# Altium PCB Muladhara_Circuit.PcbDoc
Units mm, origin at the board's own origin, x right, y up, seen from the top; angles counter-clockwise.
Board outline 20.59 x 33.58 mm, 4 copper layers (Top Layer, Layer 1, Layer 2, Bottom Layer), stack 0.603 mm thick; 35 components, 46 nets, 139 pads, 12 vias.
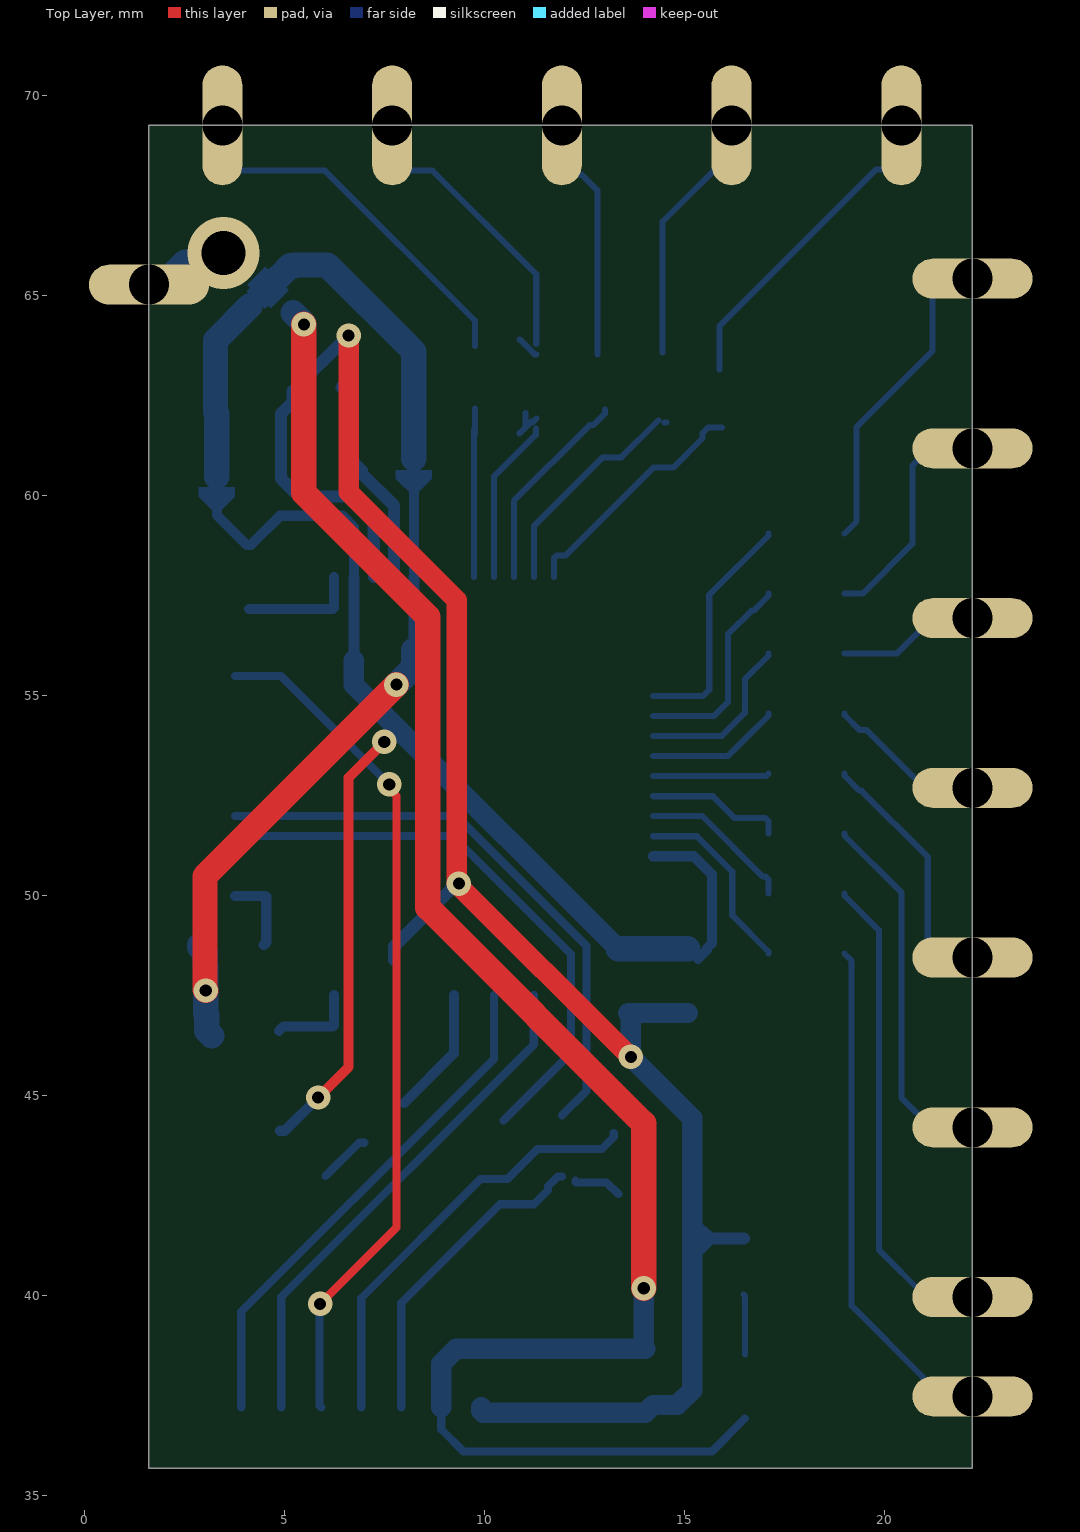
[diagram p0: Top Layer view]
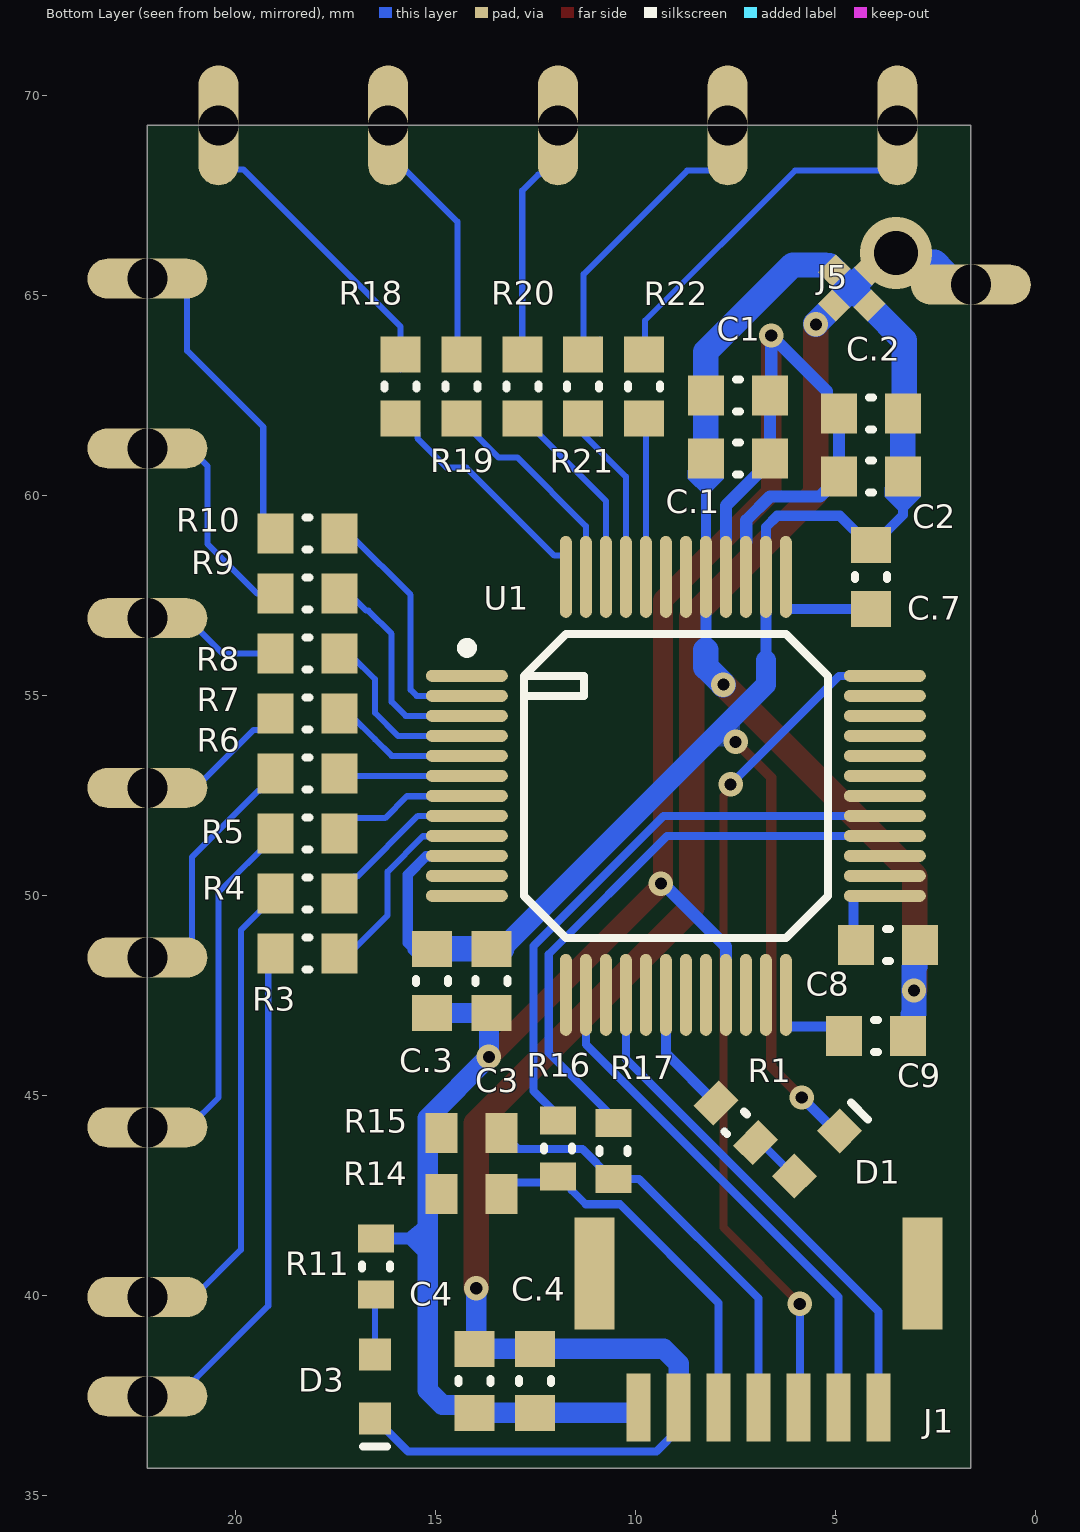
[diagram p1: Bottom Layer view, seen from below]
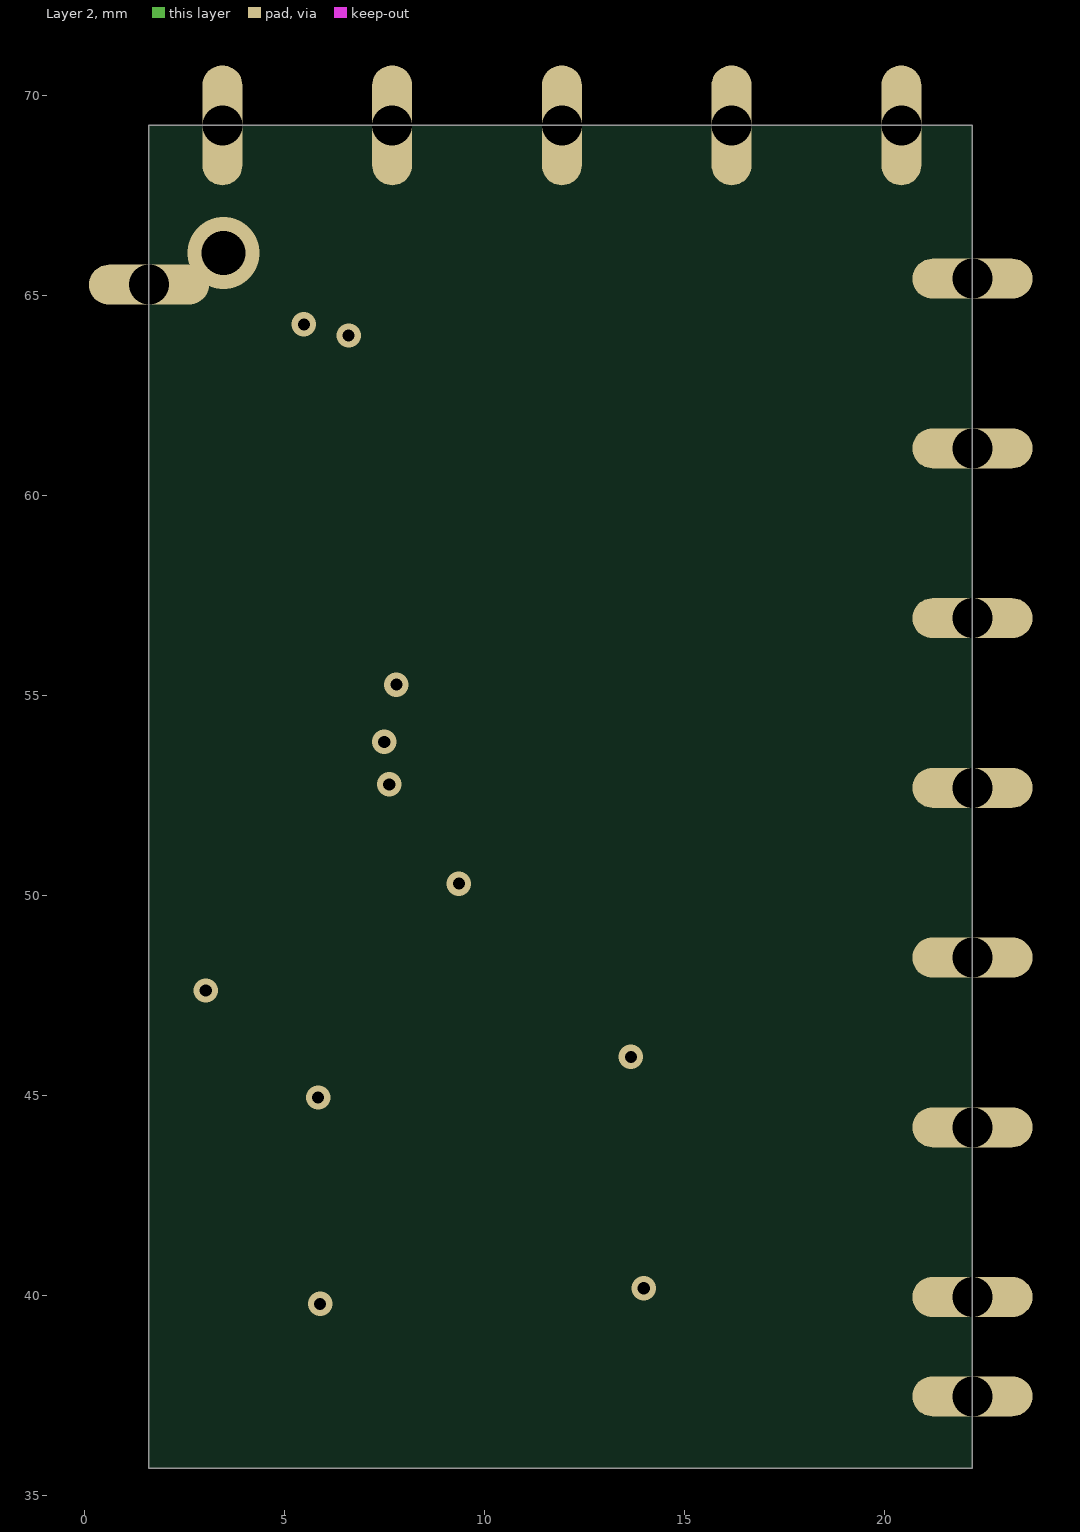
[diagram p2: Layer 2]

## Layer stack, top to bottom
Top Solder: solder mask 0.0102, Solder Resist, Dk 3.5
Top Layer: signal copper 0.0356
Dielectric 2: prepreg 0.0711, PP-006, Dk 4.1
Layer 1: signal copper 0.035
Dielectric 1: dielectric 0.32, FR-4, Dk 4.8
Layer 2: signal copper 0.035
Dielectric 3: prepreg 0.0711, PP-006, Dk 4.1
Bottom Layer: signal copper 0.0356
Bottom Solder: solder mask 0.0102, Solder Resist, Dk 3.5

## Board outline
1.612,35.687 1.612,69.262 22.2,69.262 22.2,35.687

## Design rules (kind name [scope] priority, off if disabled: settings)
BoardOutlineClearance [All] p1: gap=0.254 ignorepadtopadclearanceinfootprint=FALSE except(0: Arc-SplitContinuation Track-SplitContinuation SMDPad-SplitContinuation THPad-SplitContinuation Via-SplitContinuation Fill-SplitContinuation Poly-SplitContinuation Region-SplitContinuation Text-SplitContinuation; 0.508: Poly-OutlineEdge Poly-CavityEdge Poly-CutoutEdge Poly-SplitBarrior)
Clearance [All] p1: gap=0.152 ignorepadtopadclearanceinfootprint=FALSE except(0.305: Arc-Hole Track-Hole SMDPad-Hole THPad-Hole Via-Hole Fill-Hole Poly-Hole Region-Hole)
HoleSize [All] p1: absolutevalues=TRUE maxlimit=6.3 minlimit=0.3 maxpercent=80.000 minpercent=20.000
MinimumAnnularRing [All] p1: minimumring=0.152
MinimumSolderMaskSliver [All] p1: minsoldermaskwidth=0.178
PolygonConnect PolygonConnect_1 [All] p1: thpad.connectstyle=Relief thpad.reliefconductorwidth=0.254 thpad.reliefentries=4 thpad.polygonreliefangle="90 Angle" thpad.airgapwidth=0.254 smdpad.connectstyle=Direct smdpad.reliefconductorwidth=0.254 smdpad.reliefentries=4 smdpad.polygonreliefangle="90 Angle" smdpad.airgapwidth=0.254 via.connectstyle=Direct via.reliefconductorwidth=0.254 via.reliefentries=4 via.polygonreliefangle="90 Angle" via.airgapwidth=0.254
PolygonConnect gnd_stitch_via [InNet('GND') vs InNet('GND')] p2: thpad.connectstyle=Relief thpad.reliefconductorwidth=0.254 thpad.reliefentries=4 thpad.polygonreliefangle="90 Angle" thpad.airgapwidth=0.254 smdpad.connectstyle=Relief smdpad.reliefconductorwidth=0.254 smdpad.reliefentries=4 smdpad.polygonreliefangle="90 Angle" smdpad.airgapwidth=0.254 via.connectstyle=Direct via.reliefconductorwidth=0.254 via.reliefentries=4 via.polygonreliefangle="90 Angle" via.airgapwidth=0.254
PolygonConnect gnd_ties [InComponentClass('net_ties')] p3: connectstyle=Direct reliefconductorwidth=0.254 reliefentries=4 polygonreliefangle="90 Angle" airgapwidth=0.254
RoomDefinition Power [InComponentClass('Power')] p1: confinementstyle=ConfineOut formatcopy=TRUE lockcomponents=FALSE outline 47.346,-89.306 98.146,-89.306 98.146,-63.906 47.346,-63.906
RoomDefinition CY8C4125AZI-S433 [InComponentClass('CY8C4125AZI-S433')] p2: confinementstyle=ConfineOut formatcopy=TRUE lockcomponents=FALSE outline -10.363,-89.306 40.437,-89.306 40.437,-63.906 -10.363,-63.906
RoomDefinition CSX_Capsense [InComponentClass('CSX_Capsense')] p3: confinementstyle=ConfineOut formatcopy=TRUE lockcomponents=FALSE outline 57.455,-42.062 65.964,-42.062 65.964,-37.49 57.455,-37.49
RoomDefinition Comm [InComponentClass('Comm')] p4: confinementstyle=ConfineOut formatcopy=TRUE lockcomponents=FALSE outline 60.96,-47.244 64.77,-47.244 64.77,-42.672 60.96,-42.672
RoutingVias [All] p1: holewidth=0.711 width=1.27 viastyle="Through Hole" minholewidth=0.305 minwidth=0.61 maxholewidth=1.27 maxwidth=2.54
SilkToSilkClearance [All] p1: silktosilkclearance=0.102
SilkToSolderMaskClearance [IsPad] p1: minsilkscreentomaskgap=0.178 clearancetoexposedcopper=TRUE
SolderMaskExpansion [All] p1: expansion=0.102 istentingtop=FALSE
Width [All] p1: maxlimit=3.556 minlimit=0.152 preferedwidth=0.254 toplayer_maxwidth=2.54 midlayer1_maxwidth=2.54 midlayer2_maxwidth=2.54 minimp=50.000000 maximp=50.000000 favimp=50.000000
26 further rules are at their usual default settings.

## Classes and differential pairs
component class Power: D3 J5 R11
component class CY8C4125AZI-S433: C1 C2 C3 C.1 C.2 C.3 C.7 R14 R15 R16 R17 U1
component class CSX_Capsense: C8 C9 R3 R4 R5 R6 R7 R8 R9 R10 R18 R19 R20 R21 R22
component class Comm: C4 C.4 D1 J1 R1

## Components (designator, comment, footprint, x,y, rotation, side; value= is the part's Value field where it differs from the comment)
C1 "1uF" CAPC0603(1608)100_N 7.436,62.503 r180 bottom
C2 "1uF" CAPC0603(1608)100_N 4.111,60.482 r180 bottom
C3 "1uF" CAPC0603(1608)100_N 13.594,47.873 r90 bottom
C4 "1uF" CAPC0603(1608)100_N 14.021,37.877 r90 bottom
C8 "470pF" CAPC0603(1608)100_N 3.683,48.768 r180 bottom
C9 "470pF" CAPC0603(1608)100_N 3.986,46.497 r180 bottom
C.1 "0.1uF" CAPC0603(1608)100_N 7.436,60.932 r180 bottom value=1uF
C.2 "0.1uF" CAPC0603(1608)100_N 4.111,62.053 r180 bottom value=1uF
C.3 "0.1uF" CAPC0603(1608)100_N 15.086,47.873 r90 bottom value=1uF
C.4 "0.1uF" CAPC0603(1608)100_N 12.512,37.877 r90 bottom value=1uF
C.7 "0.1uF" CAPC0603(1608)100_N 4.111,57.973 r90 bottom value=1uF
D1 "150060BS75000" 0603_A 5.461,43.561 r315 bottom
D3 "150060BS75000" 0603_A 16.509,37.731 r90 bottom
J1 "BM07B-NSHSS-TBT (LF)(SN)" "BM07B-NSHSS-TBT (LF)(SN)" 16.919,45.214 r0 bottom
J5 "Star_tie" Star_tie -464.314,-427.229 r225 bottom net-tie
R1 "330" RESC0603(1608)_L 7.493,44.323 r225 bottom value="330.00 Ohm"
R3 "2K" RESC0603(1608)_N 18.201,48.556 r0 bottom value="2000.00 Ohm"
R4 "2K" RESC0603(1608)_N 18.201,50.056 r0 bottom value="2000.00 Ohm"
R5 "2K" RESC0603(1608)_N 18.201,51.556 r0 bottom value="2000.00 Ohm"
R6 "2K" RESC0603(1608)_N 18.201,53.056 r0 bottom value="2000.00 Ohm"
R7 "2K" RESC0603(1608)_N 18.201,54.556 r0 bottom value="2000.00 Ohm"
R8 "2K" RESC0603(1608)_N 18.201,56.056 r0 bottom value="2000.00 Ohm"
R9 "2K" RESC0603(1608)_N 18.201,57.556 r0 bottom value="2000.00 Ohm"
R10 "2K" RESC0603(1608)_N 18.201,59.056 r0 bottom value="2000.00 Ohm"
R11 "330" RESC0603(1608)_L 16.485,40.732 r270 bottom value="330.00 Ohm"
R14 "4.7K" RESC1608X55X25ML10T15 14.097,42.545 r0 bottom
R15 "4.7K" RESC1608X55X25ML10T15 14.097,44.069 r0 bottom
R16 "330" RESC0603(1608)_L 11.938,43.688 r270 bottom value="330.00 Ohm"
R17 "330" RESC0603(1608)_L 10.541,43.623 r270 bottom value="330.00 Ohm"
R18 "2K" RESC0603(1608)_N 15.875,62.738 r90 bottom value="2000.00 Ohm"
R19 "2K" RESC0603(1608)_N 14.351,62.738 r90 bottom value="2000.00 Ohm"
R20 "2K" RESC0603(1608)_N 12.827,62.738 r90 bottom value="2000.00 Ohm"
R21 "2K" RESC0603(1608)_N 11.303,62.738 r90 bottom value="2000.00 Ohm"
R22 "2K" RESC0603(1608)_N 9.779,62.738 r90 bottom value="2000.00 Ohm"
U1 "CY8C4125AZI-S433" CY8C4125AZI-S433 8.986,52.748 r180 bottom locked

## Footprints (in the part's own frame and the unit in brackets; to place one, negate y for a bottom-side part, rotate by r counter-clockwise, add the part's x,y. Pads: shape width x height; smd on the part's side, far side on the other; paste and mask are expansions set on the pad)
0603_A [mm] "Chip LED, 2-Leads, Body 1.6x0.8mm, IPC Medium Density"
  rect 0.8x0.8 smd: 1(-0.8,0) 2(0.8,0)
  silkscreen extent -1.5,-0.3 -1.5,0.3, body extent -0.8,-0.4 0.8,0.4, height 0.7
"BM07B-NSHSS-TBT (LF)(SN)" [mm]
  rect 1x2.8 smd paste-2.54 mask+0.1: 0(-14.1,4.65) 0(-5.9,4.65)
  rect 0.6x1.7 smd paste-2.54 mask+0.1: 1(-13,8) 2(-12,8) 3(-11,8) 4(-10,8) 5(-9,8) 6(-8,8) 7(-7,8)
CAPC0603(1608)100_N [mm] "Chip Capacitor, Body 1.6x0.8mm, Height 1.0mm, IPC Medium Density"
  rect 0.9x1 smd: 1(-0.8,0) 2(0.8,0)
  silkscreen extent -0.05,-0.4 0.05,0.4, body extent -0.87,-0.48 0.88,0.47, height 1
CY8C4125AZI-S433 [mm] "CQFP, 48-Leads, Body 11.70x11.70mm, Pitch 0.50mm, IPC Medium Density"
  oval 2.05x0.3 smd: 1(-5.225,2.75) 2(-5.225,2.25) 3(-5.225,1.75) 4(-5.225,1.25) 5(-5.225,0.75) 6(-5.225,0.25) 7(-5.225,-0.25) 8(-5.225,-0.75) 9(-5.225,-1.25) 10(-5.225,-1.75) 11(-5.225,-2.25) 12(-5.225,-2.75) 25(5.225,-2.75) 26(5.225,-2.25) 27(5.225,-1.75) 28(5.225,-1.25) 29(5.225,-0.75) 30(5.225,-0.25) 31(5.225,0.25) 32(5.225,0.75) 33(5.225,1.25) 34(5.225,1.75) 35(5.225,2.25) 36(5.225,2.75)
  oval 0.3x2.05 smd: 13(-2.75,-5.225) 14(-2.25,-5.225) 15(-1.75,-5.225) 16(-1.25,-5.225) 17(-0.75,-5.225) 18(-0.25,-5.225) 19(0.25,-5.225) 20(0.75,-5.225) 21(1.25,-5.225) 22(1.75,-5.225) 23(2.25,-5.225) 24(2.75,-5.225) 37(2.75,5.225) 38(2.25,5.225) 39(1.75,5.225) 40(1.25,5.225) 41(0.75,5.225) 42(0.25,5.225) 43(-0.25,5.225) 44(-0.75,5.225) 45(-1.25,5.225) 46(-1.75,5.225) 47(-2.25,5.225) 48(-2.75,5.225)
  silkscreen extent -5.35,-3.8 3.8,3.8, body extent -3.5,-3.5 3.5,3.5, height 1.4
RESC0603(1608)_L [mm] "Chip Resistor, Body 1.6x0.8mm, IPC High Density"
  rect 0.7x0.9 smd: 1(-0.7,0) 2(0.7,0)
  silkscreen extent -0.05,-0.35 0.05,0.35, body extent -0.85,-0.47 0.85,0.47, height 0.6
RESC0603(1608)_N [mm] "Chip Resistor, Body 1.6x0.8mm, IPC Medium Density"
  rect 0.9x1 smd: 1(-0.8,0) 2(0.8,0)
  silkscreen extent -0.05,-0.4 0.05,0.4, body extent -0.85,-0.47 0.85,0.47, height 0.6
RESC1608X55X25ML10T15 [mm] "Chip Resistor, 2-Leads, Body 1.60x0.80mm, IPC Low Density"
  rect 0.8x1 smd: 1(-0.75,0) 2(0.75,0)
  body extent -0.85,-0.45 0.85,0.45, height 0.55
Star_tie [mil]
  rect 25x20 smd paste-100 mask-100: 1(-26762.49,680.64) 3(-26762.49,630.26)
  rect 20x25 smd paste-100 mask-100: 2(-26737.66,654.99) 4(-26786.7,654.78)
  Top Layer region: -26745.42,667.45 -26745.42,642.48 -26778.84,642.46 -26778.84,667.42 -26763.57,667.28
  Top Layer region: -26774.88,671.64 -26749.93,671.64 -26749.91,638.84 -26774.87,638.84 -26774.72,654.84
  Top Layer region: -26793.56,667.51

## Part data
C1 C2 C3 C4: library part CMP-1035-02746-1, "CAP 1uF 50V ±20% 0603 (1608 Metric) Thickness 1mm SMD", Case-EIA=0603, Case-Metric=1608, Rated Voltage="50 V", Tolerance=Â±20%, Max Thickness="1 mm", Technology=SMT
C8 C9: library part CMP-1035-01661-1, "CAP 470pF 10V ±10% 0603 (1608 Metric) Thickness 1mm SMD", Case-EIA=0603, Case-Metric=1608, Rated Voltage="10 V", Tolerance=Â±10%, Max Thickness="1 mm", Technology=SMT
C.1 C.2 C.3 C.4 C.7: library part CMP-1035-02746-1, "CAP 0.1 uF 50V ±20% 0603 (1608 Metric) Thickness 1mm SMD", Case-EIA=0603, Case-Metric=1608, Rated Voltage="50 V", Tolerance=Â±20%, Max Thickness="1 mm", Technology=SMT
D1 D3: library part CMP-1426-00003-1, "SMD mono-color Chip LED, WL-SMCW, Blue", Color=Blue, Manufacturer="Wuerth Elektronik", ComponentLink1Description="Manufacturer URL", ComponentLink1URL=http://www.we-online.com, ComponentLink2Description=Datasheet, ComponentLink2URL=http://katalog.we-online.com/led/datasheet/150060BS75000.pdf, PackageReference=0603_A, PartNumber=150060BS75000
R1 R11 R16 R17: library part CMP-1012-00062-1, "330R 0.1W 5% 0603 (1608 Metric)  SMD", Case-EIA=0603, Case-Metric=1608, Power="0.1 W", Tolerance="5 %", Technology=SMT
R3 R4 R5 R6 R7 R8 R9 R10 R18 R19 R20 R21 R22: library part CMP-1012-00081-1, "2K 0.1W 5% 0603 (1608 Metric)  SMD", Case-EIA=0603, Case-Metric=1608, Power="0.1 W", Tolerance="5 %", Technology=SMT
R14 R15: library part CMP-2000-05024-1, "RC0603JR-074K7L Chip Resistor, 4.7 KOhm, +/- 5%, 100 mW, -55 to 155 degC, 0603 (1608 Metric), RoHS, Tape and Reel", Case Code - in=0603, Case Code - mm=1608, Manufacturer=Yageo, Operating Temperature Range=-55Cto+155C, Package Description="2-Pin Surface Mount Device, Body 1.6 x 0.8 mm", Package Reference=603, Power Rating=100mW, Resistance=4.7kOhms, Temperature Coefficient=100PPM/C, Tolerance=5%, Voltage Rating=50V, Datasheet URL=http://www.yageo.com/documents/recent/PYu-RC_Group_51_RoHS_L_04.pdf, Datasheet Version="Rev. 4, 02/2016", Manufacturer URL=http://www.yageo.com/, Packaging=Reel, Product=ThickFilmResistorsGeneralPurpose, Series=RC, Termination Style=SMD/SMT

## Free pads (board coordinates)
  oval 3x1 hole 1: 4(1.612,65.278) 4(22.2,37.488) 4(22.2,39.971) 4(22.2,44.214) 4(22.2,48.457) 4(22.2,52.7) 4(22.2,56.943) 4(22.2,61.186) 4(22.2,65.429)
  oval 1x3 hole 1: 4(3.449,69.262) 4(7.692,69.262) 4(11.935,69.262) 4(16.178,69.262) 4(20.421,69.262)

## Via types
v1: diameter 0.61/0.61/0.61/0.61 (per signal layer), hole 0.305, Top Layer to Bottom Layer, 11 vias
v2: diameter 1.8, hole 1.1, Top Layer to Bottom Layer, 1 vias

## Nets (pads, with @x,y where several pads share a name; then routed paths per layer and width w, separated by ;. In a path a pad name is that pad's centre, name@x,y a point inside that pad or via, vN(x,y) a via of type N, cw(c..) or ccw(c..) an arc to the next point about the centre after c; other vN are vias at no path point)
+3v3: C1.2 C2.1 C3.1 C4.1 C.1.2 C.2.1 C.3.1 C.4.1 J1.7 R11.1 R14.2 R15.2 U1.21 U1.39 U1.40 | length 57.3
  Top Layer w0.508: v1(6.604,64.008) 6.604,60.093 9.31,57.387 9.31,50.357 v1(9.361,50.306) ; v1@9.31,50.306 13.642,45.974 v1(13.661,45.974)
  Bottom Layer w0.305: U1.39 7.236,58.843 7.227,58.852 7.227,59.391 6.636,59.982 5.383,59.982 5.256,60.109 5.234,60.109 4.911,60.432 C2.1 C.2.1 5.209,62.351 5.209,62.613 v1(6.604,64.008) 6.604,62.891 6.426,62.713 C1.2 C.1.2 6.934,60.634 6.934,60.561 7.736,59.759 U1.40 ; U1.21@7.736,48.395 7.736,48.733 9.31,50.306 v1(9.361,50.306) ; 15.103,41.541 15.192,41.451 15.211,41.432 R11.1
  Bottom Layer w0.508: J1.7 9.919,37.123 9.965,37.077 C.4.1 C4.1 14.217,37.273 14.825,37.273 15.192,37.64 15.192,41.451 15.192,44.443 v1(13.661,45.974) 13.661,47.005 C3.1 C.3.1
CintA: C9.1 U1.24 | length 2.2
  Bottom Layer w0.254: C9.1@4.861,46.622 4.975,46.736 6.215,46.736 6.236,46.757 U1.24
CintB: C8.1 U1.25 | length 2
  Bottom Layer w0.254: U1.25 4.524,49.998 4.546,49.977 4.546,48.831 C8.1
GND: C4.2 C.4.2 D3.1 J1.6 J5.3 | length 44.6
  Top Layer w0.635: v1(5.486,64.287) 5.486,60.074 8.586,56.974 8.586,49.707 13.98,44.313 v1(13.98,40.188)
  Bottom Layer w0.203: J1.6 8.919,36.664 9.473,36.11 15.687,36.11 D3.1
  Bottom Layer w0.508: J1.6 8.919,38.305 9.291,38.677 C.4.2 C4.2 13.98,38.718 v1(13.98,40.188)
  Bottom Layer w0.635: J5.3@5.213,64.58 5.486,64.307 v1(5.486,64.287)
LED1: U1.17
LED2: R1.1 U1.18 | length 3.2
  Bottom Layer w0.254: R1.1 9.236,46.066 U1.18
NetC.7_1: C.7.1 U1.37 | length 2.9
  Bottom Layer w0.254: C.7.1 6.215,57.173 6.236,57.194 U1.37
NetD1_2: D1.2 R1.2 | length 1.3
  Bottom Layer w0.203: D1.2 6.859,43.828 R1.2
NetD3_2: D3.2 R11.2 | length 1.5
  Bottom Layer w0.152: R11.2 16.481,40.029 16.509,40.001 D3.2
NetR16_1: R16.1 U1.29 | length 14.6
  Bottom Layer w0.203: U1.29 9.3,51.998 12.548,48.75 12.548,45.125 R16.1@11.938,44.515
NetR17_1: R17.1 U1.28 | length 14.5
  Bottom Layer w0.203: U1.28 9.207,51.498 12.167,48.539 12.167,46.076 R17.1@10.477,44.386
RX0: R10.1 U1.2 | length 6
  Bottom Layer w0.152: U1.2 15.467,54.998 15.621,55.152 15.621,57.526 17.101,59.006 R10.1@17.101,59.056
RX0_PAD: pad.4@22.2,65.429 R10.2 | length 7.6
  Bottom Layer w0.152: R10.2 19.304,59.359 19.304,61.722 21.206,63.624 21.206,65.038 21.321,65.153 pad.4@21.816,65.153
RX1: R9.1 U1.3 | length 5.2
  Bottom Layer w0.152: U1.3 15.743,54.498 16.093,54.848 16.093,56.548 16.678,57.132 16.728,57.132 17.101,57.506 R9.1@17.101,57.556
RX1_PAD: pad.4@22.2,61.186 R9.2 | length 5.5
  Bottom Layer w0.152: R9.2 19.456,57.556 20.7,58.8 20.7,60.75 21.063,61.113 pad.4@21.87,61.113
RX2: R8.1 U1.4 | length 4.3
  Bottom Layer w0.152: U1.4 15.935,53.998 16.509,54.572 16.509,55.414 17.101,56.006 R8.1@17.101,56.056
RX2_PAD: pad.4@22.2,56.943 R8.2 | length 3.1
  Bottom Layer w0.152: R8.2 20.313,56.056 20.923,56.667 21.816,56.667 pad.4@21.87,56.613
RX3: R7.1 U1.5 | length 3.4
  Bottom Layer w0.152: U1.5 16.093,53.498 16.509,53.914 17.101,54.506 R7.1@17.101,54.556
RX3_PAD: pad.4@22.2,52.7 R7.2 | length 3.4
  Bottom Layer w0.152: R7.2 19.001,54.522 19.375,54.148 19.546,54.148 20.82,52.874 pad.4@21.713,52.874
RX4: R6.1 U1.6 | length 2.9
  Bottom Layer w0.152: U1.6 17.043,52.998 R6.1@17.101,53.056
RX4_PAD: pad.4@22.2,48.457 R6.2 | length 5.4
  Bottom Layer w0.152: R6.2 19.001,53.006 19.375,52.632 19.425,52.632 21.082,50.976 21.082,48.689 pad.4@21.165,48.606
RX5: R5.1 U1.7 | length 3.5
  Bottom Layer w0.152: U1.7 14.22,52.489 15.71,52.489 16.256,51.943 17.028,51.943 17.101,51.869 R5.1@17.101,51.556
RX5_PAD: pad.4@22.2,44.214 R5.2 | length 8.2
  Bottom Layer w0.152: R5.2 19.001,51.506 20.422,50.086 20.422,44.958 pad.4@21.165,44.214
RX6: R4.1 U1.8 | length 3.9
  Bottom Layer w0.152: U1.8 15.439,51.998 16.957,50.48 17.028,50.48 17.101,50.406 R4.1@17.101,50.056
RX6_PAD: pad.4@22.2,39.971 R4.2 | length 10.9
  Bottom Layer w0.152: R4.2 19.001,50.006 19.863,49.145 19.863,41.148 pad.4@21.039,39.971
RX7: R3.1 U1.9 | length 4.8
  Bottom Layer w0.152: U1.9 14.218,51.491 15.31,51.491 16.194,50.607 16.194,49.513 17.101,48.606 R3.1@17.101,48.556
RX7_PAD: pad.4@22.2,37.488 R3.2 | length 12.3
  Bottom Layer w0.152: R3.2 19.177,48.381 19.177,39.751 20.957,37.971 20.957,37.96 21.038,37.879 pad.4@21.808,37.879
SCL: J1.4 R15.1 R17.2 | length 10.8
  Bottom Layer w0.203: J1.4 6.919,39.939 9.905,42.925 10.578,42.925 11.324,43.671 12.934,43.671 13.232,43.969 R15.1@13.232,44.069
SCLK_SWD: J1.1 U1.16 | length 12.9
  Bottom Layer w0.203: J1.1 3.919,39.606 9.474,45.161 10.236,45.923 U1.16
SDA: J1.5 R14.1 R16.2 | length 9.2
  Bottom Layer w0.203: J1.5 7.919,39.823 10.387,42.291 11.241,42.291 11.59,42.64 11.59,42.74 11.838,42.988 R16.2 ; R16.2@12.275,42.878 12.275,42.849 12.286,42.838 13.054,42.838 R14.1
SDAT: J1.2 U1.14 | length 12.9
  Bottom Layer w0.203: J1.2 4.919,39.971 11.234,46.286 11.234,47.521 U1.14
TX0: R22.1 U1.44 | length 4.3
  Bottom Layer w0.152: U1.44 9.736,61.509 R22.1@9.736,61.653 ; R22.1@9.759,61.547 9.759,61.691 R22.1@9.759,62.179
TX0_PAD: pad.4@3.449,69.262 R22.2 | length 8.9
  Bottom Layer w0.152: pad.4@3.78,68.932 3.78,68.194 3.841,68.133 6.01,68.133 9.759,64.383 R22.2@9.759,63.741
TX1: R21.1 U1.45 | length 5.3
  Bottom Layer w0.152: U1.45 10.236,60.477 11.285,61.526 R21.1@11.285,61.678 ; R21.1@10.879,61.564 11.169,61.854 11.031,61.716 R21.1@11.031,62.07 ; R21.1@11.194,61.829 R21.1
TX1_PAD: pad.4@7.692,69.262 R21.2 | length 7.7
  Bottom Layer w0.152: pad.4@8.023,68.932 8.023,68.194 8.084,68.133 8.702,68.133 11.294,65.541 R21.2@11.294,63.791 ; R21.2@10.879,63.912 R21.2@11.203,63.588 ; R21.2@11.001,63.79 R21.2@11.203,63.588 ; R21.2 11.253,63.538 R21.2@11.203,63.588
TX2: R20.1 U1.46 | length 5.2
  Bottom Layer w0.152: U1.46 10.736,59.873 12.631,61.767 12.72,61.767 13.015,62.062 R20.1@13.015,62.152
TX2_PAD: pad.4@11.935,69.262 R20.2 | length 5.7
  Bottom Layer w0.152: pad.4@12.106,68.932 12.106,68.321 12.396,68.031 12.429,68.031 12.827,67.633 R20.2
TX3: R19.1 U1.47 | length 5.5
  Bottom Layer w0.152: U1.47 11.236,59.242 12.954,60.96 13.423,60.96 R19.1@14.351,61.888 ; R19.1@14.502,61.837 R19.1@14.552,61.837
TX3_PAD: pad.4@16.178,69.262 R19.2 | length 5.9
  Bottom Layer w0.152: R19.2@14.451,63.588 14.451,66.851 pad.4@16.18,68.58 ; pad.4@16.036,68.932 pad.4@16.178,68.789
TX4: R18.1 U1.48 | length 6.1
  Bottom Layer w0.152: U1.48 11.736,58.439 11.804,58.507 12.025,58.507 14.224,60.706 14.715,60.706 15.451,61.442 15.451,61.564 15.599,61.712 R18.1@15.936,61.712
TX4_PAD: pad.4@20.421,69.262 R18.2 | length 7.6
  Bottom Layer w0.152: R18.2@15.875,63.158 15.875,64.238 19.797,68.16 20.03,68.16 20.166,68.297 pad.4@20.166,68.857
USER_SWITCH: U1.19
VSS_Capsense: J5.1 pad.4@1.612,65.278 | length 1.8
  Bottom Layer w0.635: pad.4@2.284,65.611 2.516,65.843 J5.1@3.95,65.843
  other v2: 3.48,66.065
VSSA: C1.1 C8.2 C9.2 C.1.1 J5.4 U1.41 | length 24.9
  Top Layer w0.635: v1(3.035,47.633) 3.013,47.655 3.013,50.494 v1(7.799,55.28)
  Bottom Layer w0.254: U1.41 C.1.1
  Bottom Layer w0.279: 8.236,56.147 U1.41
  Bottom Layer w0.635: C8.2 2.883,48.718 3.016,48.585 3.016,48.233 3.035,48.214 v1(3.035,47.633) 3.035,47.052 3.054,47.033 3.054,46.63 C9.2 ; J5.4@4.885,65.495 5.146,65.756 5.242,65.756 5.256,65.771 6.069,65.771 8.236,63.604 C1.1 C.1.1 ; v1(7.799,55.28) 8.236,55.718 8.236,56.147
VSSD: C2.2 C3.2 C.2.2 C.3.2 C.7.2 D1.1 J5.2 U1.10 U1.38 | length 40.1
  Top Layer w0.254: v1(5.842,44.958) 6.604,45.72 6.604,52.959 v1(7.493,53.848)
  Bottom Layer w0.254: C2.2 3.311,59.523 4.061,58.773 C.7.2 4.161,58.773 4.892,59.503 6.456,59.503 6.736,59.223 U1.38 ; D1.1 5.011,44.127 v1(5.842,44.958) ; v1(7.493,53.848) 7.493,53.913 7.798,54.218 ; U1.10 14.22,50.989 15.235,50.989 15.692,50.531 15.692,48.823 15.565,48.696 15.565,48.646 C.3.2@15.339,48.42
  Bottom Layer w0.279: 6.736,55.892 U1.38
  Bottom Layer w0.508: 6.736,55.892 6.736,55.28 7.798,54.218 C3.2@13.344,48.673
  Bottom Layer w0.635: C2.2 C.2.2 3.277,62.088 3.277,63.888 J5.2 ; C3.2@13.344,48.673 C3.2 C.3.2
XRES: J1.3 U1.36 | length 21.4
  Top Layer w0.203: v1(5.891,39.8) 7.8,41.709 7.8,52.497 7.62,52.677 v1(7.62,52.787)
  Bottom Layer w0.203: U1.36 4.91,55.498 v1(7.62,52.787) ; v1(5.891,39.8) 5.88,39.789 5.88,37.252 J1.3
pads on no net: J1.0 U1.1 U1.11 U1.12 U1.13 U1.15 U1.20 U1.22 U1.23 U1.26 U1.27 U1.30 U1.31 U1.32 U1.33 U1.34 U1.35 U1.42 U1.43

## Polygon pours and split planes (outlines as drawn)
VSSD on Bottom Layer "VSSD_L04_P019" (solid, pour order 19): 8.157,53.86 8.039,53.742 7.387,53.742 7.387,54.375 7.514,54.502
no net on Bottom Layer "NONET_L04_P017" (solid, pour order 17): 15.848,40.67
no net on Bottom Layer "NONET_L04_P006" (solid, pour order 6): 23.725,37

## Other copper
Layer 2:
  region: 0.073,36.512
Bottom Layer:
  region net VSSD: 3.761,59.982 3.311,59.532 2.861,59.982 2.861,60.211 3.759,60.211 3.761,60.213
  region net VSSA: 8.686,60.432 8.686,60.636 7.786,60.636 7.786,60.432 8.255,59.963 8.255,60.001
  region net +3v3: 15.192,40.777 15.015,41.451 15.015,42.141 15.866,41.451

## Silkscreen, mask and mechanical layers (free items; w line width, h text height)
Mechanical 1:
  lines w0.203: 1.612,35.687 22.2,35.687 22.2,69.262 1.612,69.262 1.612,58.037 1.612,35.687